# Altium PCB PCB.PcbDoc (part 1 of 2)
Units mil, origin at the board's own origin, x right, y up, seen from the top; angles counter-clockwise.
Board outline 2019.68 x 789.37 mil, 4 copper layers (Top Layer, GND Layer, Power Layer, Bottom Layer), stack 60.473 mil thick; 79 components, 57 nets, 311 pads, 115 vias.
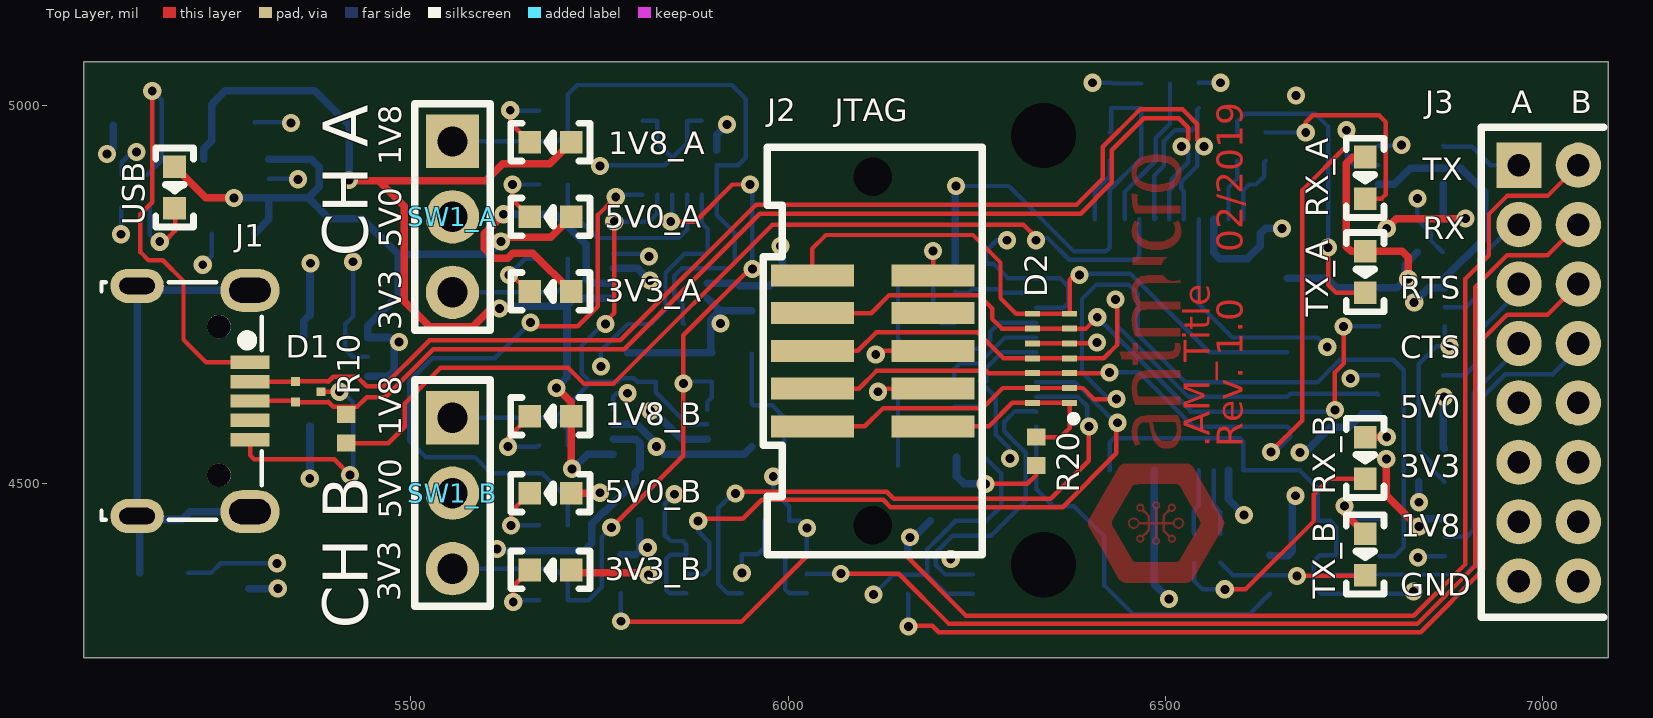
[diagram p0: Top Layer view]
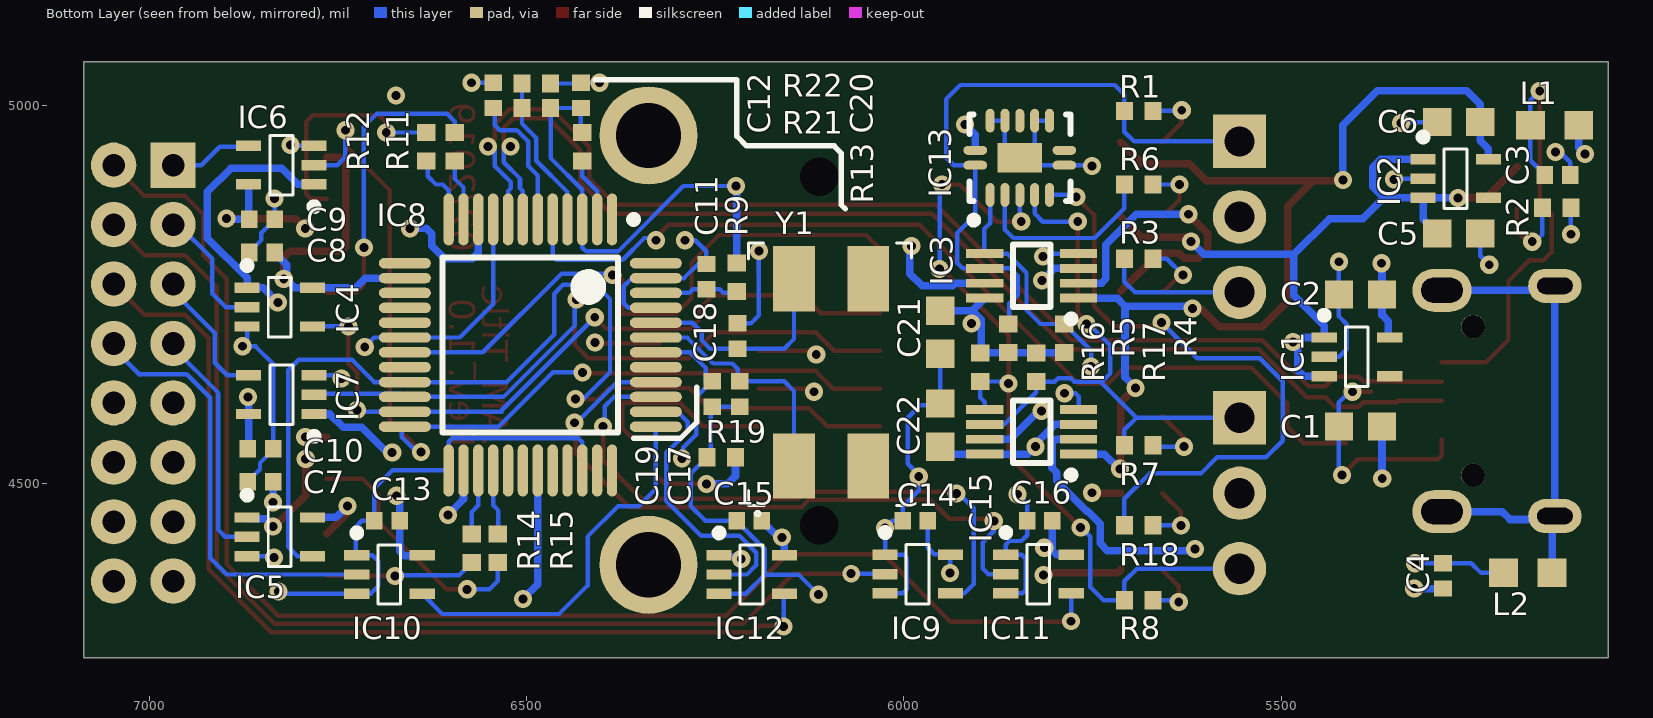
[diagram p1: Bottom Layer view, seen from below]
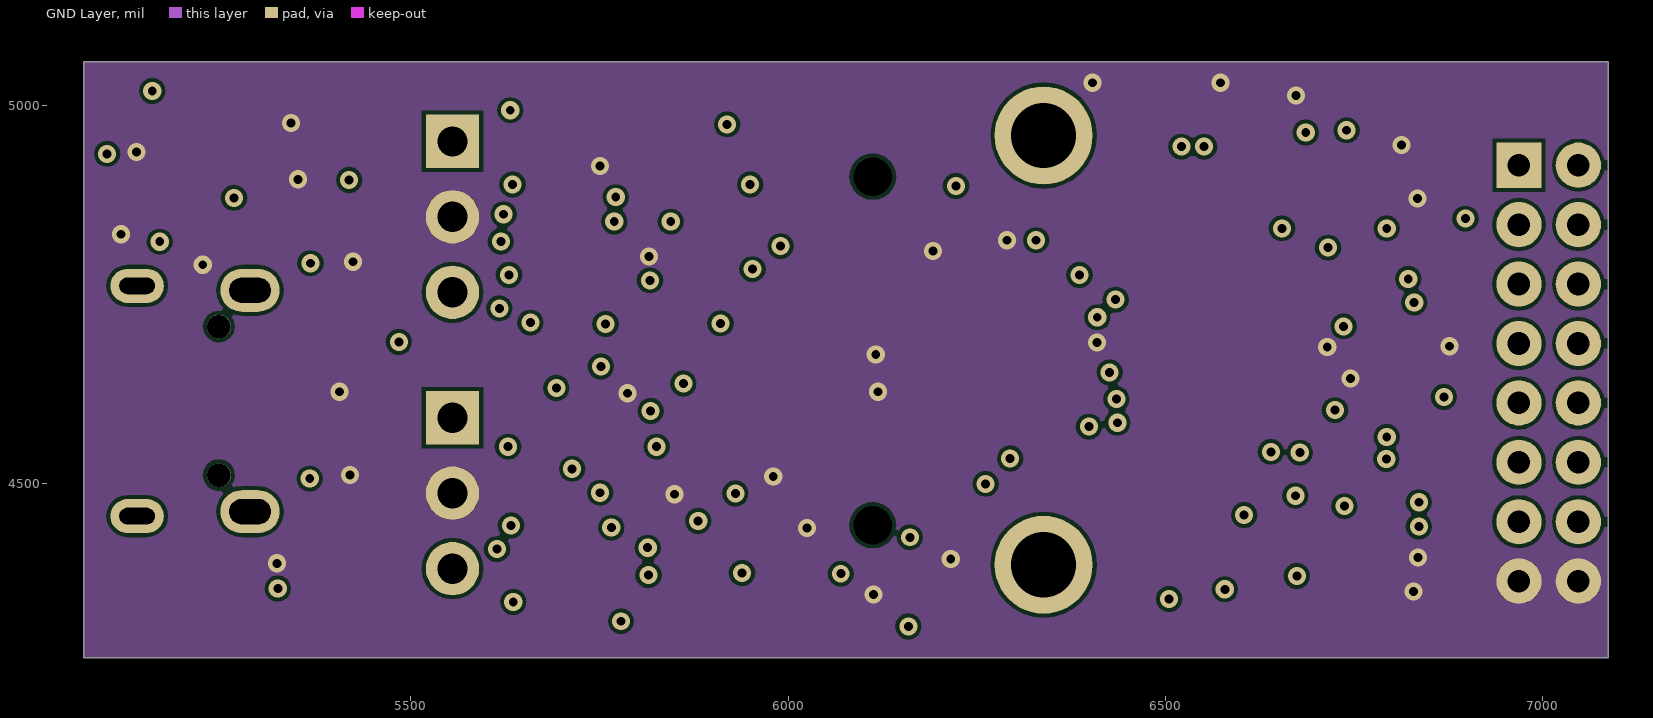
[diagram p2: GND Layer]
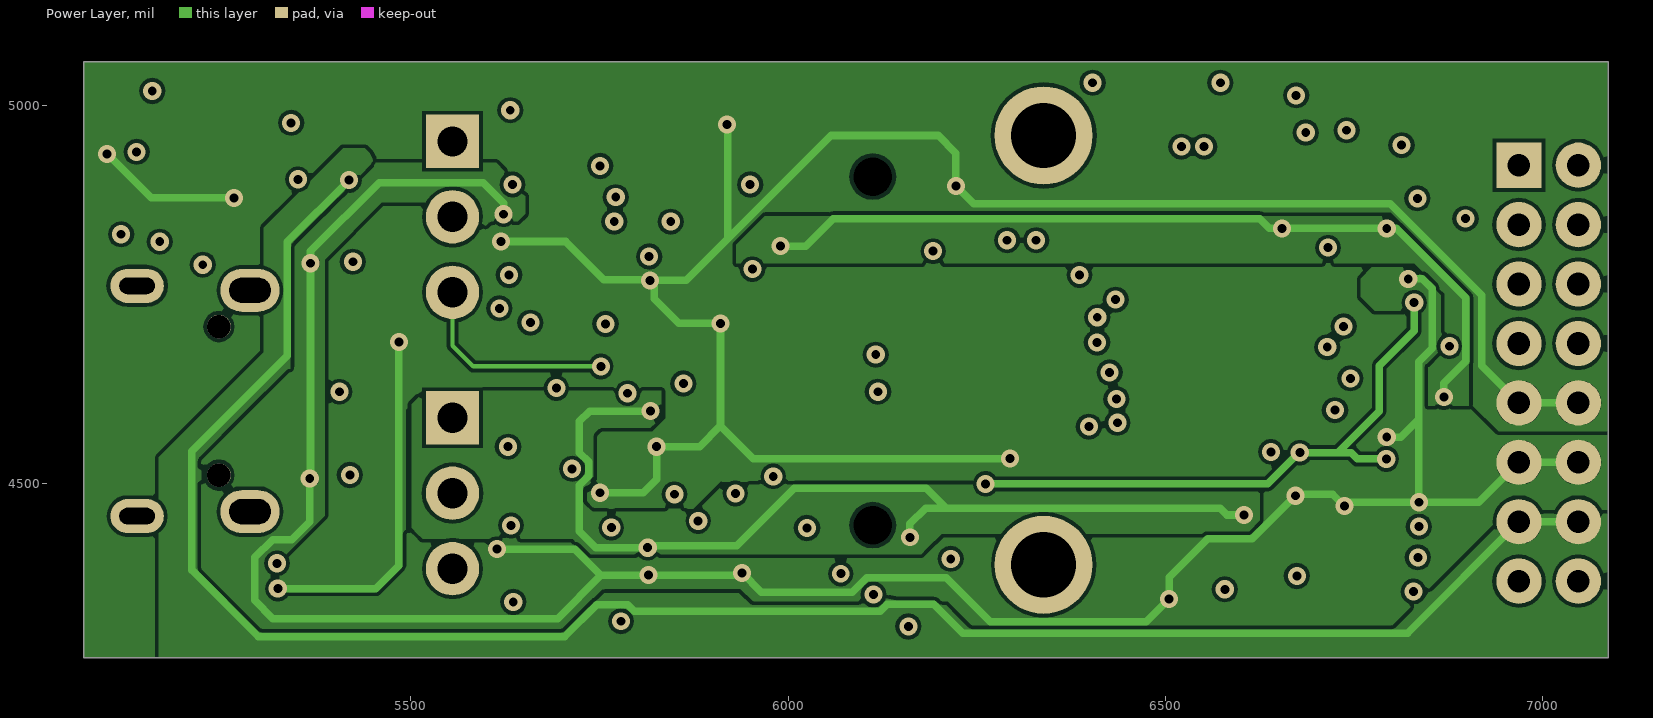
[diagram p3: Power Layer]
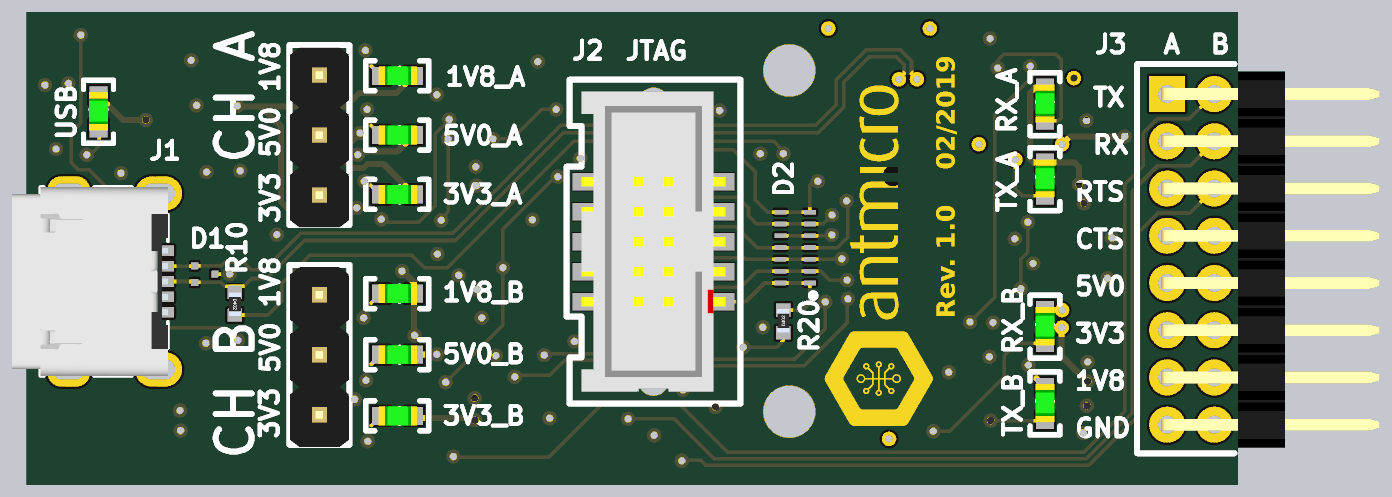
[diagram p5: 3D render of the assembled board from above, using the file's embedded part models]
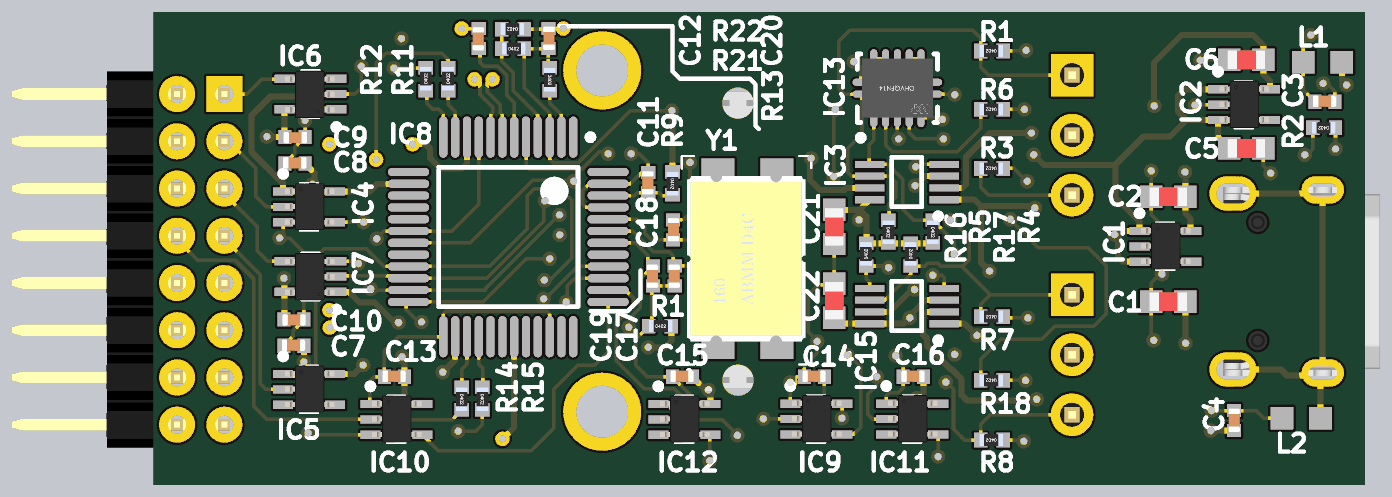
[diagram p6: 3D render of the assembled board from below, using the file's embedded part models]

## Layer stack, top to bottom
Top Solder: solder mask 0.3937, Solder Resist, Dk 3.5
Top Layer: signal copper 1.378
Dielectric 1: prepreg 14.1732, 7628MR, Dk 4.6
GND Layer: signal copper 0.7087
Dielectric 3: prepreg 14.1732, 7628MR, Dk 4.6
Power Layer: signal copper 0.7087
Dielectric 2: core 27.9528, FR+4, Dk 4.3
Bottom Layer: signal copper 1.378
Bottom Solder: solder mask 0.3937, Solder Resist, Dk 3.5

## Board outline
5066.93,4268.7 7086.61,4268.7 7086.61,5058.07 5066.93,5058.07

## Design rules (kind name [scope] priority, off if disabled: settings)
Clearance [All] p1: gap=5
DiffPairsRouting [All] p1: maxlimit=6 minlimit=6 mostfreqgap=6 toplayer_minwidth=6 toplayer_maxwidth=6 toplayer_prefwidth=6 midlayer1_minwidth=6 midlayer1_maxwidth=6 midlayer1_prefwidth=6 midlayer2_minwidth=6 midlayer2_maxwidth=6 midlayer2_prefwidth=6 bottomlayer_minwidth=6 bottomlayer_maxwidth=6 bottomlayer_prefwidth=6 maxuncoupledlength=500
HoleSize [All] p1: absolutevalues=TRUE maxlimit=150 minlimit=9.84 maxpercent=80.000 minpercent=20.000
MinimumAnnularRing [All] p1: minimumring=5.91
MinimumSolderMaskSliver [All] p1: minsoldermaskwidth=0
PlaneClearance [All] p1: clearance=10
PlaneConnect [All] p1: planeconnectstyle=Direct reliefexpansion=20 reliefentries=4 reliefconductorwidth=10 reliefairgap=10
PolygonConnect [All] p1: connectstyle=Relief reliefconductorwidth=19.68 reliefentries=4 polygonreliefangle="90 Angle" airgapwidth=0
RoutingVias [All] p1: holewidth=11.81 width=24.02 viastyle="Through Hole" minholewidth=11.81 minwidth=24.02 maxholewidth=11.81 maxwidth=24.02
SilkToSilkClearance [All] p1: silktosilkclearance=0
SilkToSolderMaskClearance [IsPad] p1: minsilkscreentomaskgap=0 clearancetoexposedcopper=TRUE
SolderMaskExpansion ViaTenting [isVia] p1: expansion=-11.81
SolderMaskExpansion [All] p2: expansion=4
Width [All] p1: maxlimit=78.74 minlimit=5.91 preferedwidth=8
22 further rules are at their usual default settings.

## Classes and differential pairs
differential pair USB_D: +USB_D_P -USB_D_N

## Components (designator, comment, footprint, x,y, rotation, side; value= is the part's Value field where it differs from the comment)
1V8_A "KPT-1608SGC" LED0603 5685.04,4951.77 r180 top
1V8_B "KPT-1608SGC" LED0603 5685.04,4588.58 r180 top
3V3_A "KPT-1608SGC" LED0603 5685.04,4753.94 r180 top
3V3_B "KPT-1608SGC" LED0603 5685.04,4384.84 r180 top
5V0_A "KPT-1608SGC" LED0603 5685.04,4852.85 r180 top
5V0_B "KPT-1608SGC" LED0603 5685.04,4486.71 r180 top
C1 "1u" 0603#1 5395,4575.16 r180 bottom
C2 "1u" 0603#1 5395,4750 r180 bottom
C3 "10n" 0402#1 5133.86,4908.46 r180 bottom
C4 "100n" 0402#1 5285.43,4376.97 r270 bottom
C5 "1u" 0603#1 5264.76,4830.71 r0 bottom
C6 "1u" 0603#1 5264.76,4978.35 r180 bottom
C7 "100n" 0402#1 6852.68,4501.69 r180 bottom
C8 "100n" 0402#1 6850.71,4805.63 r180 bottom
C9 "100n" 0402#1 6850.71,4849.53 r0 bottom
C10 "100n" 0402#1 6852.68,4545.59 r0 bottom
C11 "100n" 0402#1 6261.81,4773.62 r90 bottom
C12 "100n" 0402#1 6544.29,5013.78 r90 bottom
C13 "100n" 0402#1 6685,4450 r180 bottom
C14 "100n" 0402#1 5985,4450 r180 bottom
C15 "100n" 0402#1 6205,4450 r180 bottom
C16 "100n" 0402#1 5820,4450 r180 bottom
C17 "27p" 0402#1 6217.52,4618.11 r90 bottom
C18 "27p" 0402#1 6220.47,4694.88 r270 bottom
C19 "100n" 0402#1 6253.94,4618.11 r90 bottom
C20 "100n" 0402#1 6428.15,5013.78 r270 bottom
C21 "100n" 0603#1 5951.77,4699.8 r90 bottom
C22 "100n" 0603#1 5951.77,4576.77 r270 bottom
D1 "TPD2E009DRTR" SOT-3 5364.17,4621.06 r270 top
D2 "TPD6E05U06" TPD6E05U06_PASS 6348.43,4665.35 r90 top
IC1 "TLV70033DCKT" SC70-5 5442.91,4692.91 r180 bottom
IC2 "TLV70018DCKT" SC70-5 5312.01,4929.13 r180 bottom
IC3 "TS5A3359" TS5A3359 5830.71,4774.61 r0 bottom
IC4 "SN74LV1T125DCKR" SC70-5 6870.39,4758.71 r180 bottom
IC5 "SN74LV1T125DCKR" SC70-5 6870.39,4454.45 r180 bottom
IC6 "SN74LV1T125DCKR" SC70-5 6781.81,4895.79 r0 bottom
IC7 "SN74LV1T125DCKR" SC70-5 6781.81,4591.52 r0 bottom
IC8 "FT2232D" LQFP-48 6495.08,4683.07 r270 bottom
IC9 "SN74LV1T125DCKR" SC70-5 6025,4405 r180 bottom
IC10 "SN74LV1T125DCKR" SC70-5 6725,4404.45 r180 bottom
IC11 "SN74LV1T125DCKR" SC70-5 5865,4405 r180 bottom
IC12 "SN74LV1T125DCKR" SC70-5 6245,4404.45 r180 bottom
IC13 "74HC00BQ" DHVQFN14 5846.46,4931.1 r90 bottom
IC15 "TS5A3359" TS5A3359 5830.71,4567.91 r0 bottom
J1 "" WE_629105150521 5172.83,4608.82 r270 top
J2 "SHF-105-01-L-D-SM" SHF-105-01-X-D-SM 6112.2,4675.2 r90 top
J3 "MH_2X08_2.00_RA" MH_2X08_2.00_RA 6968.5,4921.26 r270 top
L1 "BLM18SG121TN1D" 0603#2 5137.8,4974.41 r0 bottom
L2 "BLM18SG121TN1D" 0603#2 5173.23,4380.91 r180 bottom
R1 "220R" 0402#2 5688.98,4993.11 r0 bottom
R2 "470R" 0402#2 5135,4865 r0 bottom
R3 "220R" 0402#2 5688.98,4797.24 r0 bottom
R4 "10k" 0402#2 5787.4,4691.93 r270 bottom
R5 "10k" 0402#2 5861.55,4691.93 r270 bottom
R6 "220R" 0402#2 5688.98,4895.67 r0 bottom
R7 "220R" 0402#2 5688.98,4550.2 r0 bottom
R8 "220R" 0402#2 5688.98,4344.49 r0 bottom
R9 "470R" 0402#2 6221.46,4772.64 r270 bottom
R10 "1k54" 0402#2 5414.37,4571.85 r270 top
R11 "220R" 0402#2 6595.47,4945.87 r90 bottom
R12 "220R" 0402#2 6632.87,4945.87 r90 bottom
R13 "10k" 0402#2 6426.18,4945.87 r270 bottom
R14 "220R" 0402#2 6572.76,4413.58 r270 bottom
R15 "220R" 0402#2 6538.31,4413.58 r270 bottom
R16 "10k" 0402#2 5898.62,4653.54 r90 bottom
R17 "10k" 0402#2 5824.48,4653.54 r90 bottom
R18 "220R" 0402#2 5688.98,4443.9 r0 bottom
R19 "10k" 0402#2 6242.13,4534.45 r180 bottom
R20 "0R" 0402#2 6328.74,4542.32 r90 top
R21 "4k7" 0402#2 6487.2,4997.05 r180 bottom
R22 "10k" 0402#2 6487.2,5029.53 r0 bottom
RX_A "KPT-1608SGC" LED0603 6764.76,4904.53 r270 top
RX_B "KPT-1608SGC" LED0603 6764.76,4533.46 r270 top
SW1_A "MH_1X03_2.54" MH_1X03_2.54 5555.33,4952.76 r270 top
SW1_B "MH_1X03_2.54" MH_1X03_2.54 5555.33,4586.61 r270 top
TX_A "KPT-1608SGC" LED0603 6764.76,4779.53 r270 top
TX_B "KPT-1608SGC" LED0603 6764.76,4405.51 r270 top
USB "KPT-1608SGC" LED0603 5187.01,4891.73 r270 top
Y1 "MQ-6.000-12-30/30/" Crystal_5x7mm 6145.67,4522.64 r90 bottom

## Footprints (in the part's own frame and the unit in brackets; to place one, negate y for a bottom-side part, rotate by r counter-clockwise, add the part's x,y. Pads: shape width x height; smd on the part's side, far side on the other; paste and mask are expansions set on the pad)
0402#1 [mm]
  rect 0.55x0.6 smd: 1(-0.425,0) 2(0.425,0)
  body extent -0.51,-0.23 0.5,0.27, height 0.49
0402#2 [mm]
  rect 0.57x0.62 smd: 1(-0.48,0) 2(0.48,0)
  body extent -0.47,-0.25 0.53,0.25, height 0.35
0603#1 [mm]
  rect 0.95x0.95 smd: 1(-0.725,0) 2(0.725,0)
  body extent -0.8,-0.4 0.8,0.4, height 0.45
0603#2 [mm] "Chip Inductor Ferrite Bead 0603"
  rect 0.97x0.96 smd: 1(-0.815,0) 2(0.815,0)
  body extent -0.87,-0.48 0.87,0.47, height 0.6
Crystal_5x7mm [mm]
  rect 2.2x1.4 smd: 1(0,0) 2(6.3,0) 3(6.3,-2.5) 4(0,-2.5)
  silkscreen extent -1.67,-3.95 7.5,1.53, body extent -0.35,-3.7 6.65,1.3, height 1.45
DHVQFN14 [mm] "QFN, 14-Leads, Body 2.50x3.00mm, Pitch 0.50mm, Thermal Pad 1.00x1.50mm, IPC Medium Density"
  oval 0.3x0.8 smd: 1(-0.25,1.5) 7(-0.25,-1.5) 8(0.25,-1.5) 14(0.25,1.5)
  oval 0.8x0.3 smd: 2(-1.25,1) 3(-1.25,0.5) 4(-1.25,0) 5(-1.25,-0.5) 6(-1.25,-1) 9(1.25,-1) 10(1.25,-0.5) 11(1.25,0) 12(1.25,0.5) 13(1.25,1)
  rect 1x1.5 smd: 15(0,0)
  silkscreen extent -2.22,-1.7 1.45,1.7, body extent -1.25,-1.5 1.25,1.5, height 0.85
LED0603 [mil]
  rect 30x30 smd: A(-27.5,0) K(27.5,0)
  silkscreen extent -52,-25 52,25, body extent -33,-16 31,16, height 43
LQFP-48 [mm] "LQFP-48, 48-Leads, Body 7.25x7.25mm, Pitch 0.50mm, IPC Medium Density"
  oval 1.75x0.35 smd: 1(-4.225,2.75) 2(-4.225,2.25) 3(-4.225,1.75) 4(-4.225,1.25) 5(-4.225,0.75) 6(-4.225,0.25) 7(-4.225,-0.25) 8(-4.225,-0.75) 9(-4.225,-1.25) 10(-4.225,-1.75) 11(-4.225,-2.25) 12(-4.225,-2.75) 25(4.225,-2.75) 26(4.225,-2.25) 27(4.225,-1.75) 28(4.225,-1.25) 29(4.225,-0.75) 30(4.225,-0.25) 31(4.225,0.25) 32(4.225,0.75) 33(4.225,1.25) 34(4.225,1.75) 35(4.225,2.25) 36(4.225,2.75)
  oval 0.35x1.75 smd: 13(-2.75,-4.225) 14(-2.25,-4.225) 15(-1.75,-4.225) 16(-1.25,-4.225) 17(-0.75,-4.225) 18(-0.25,-4.225) 19(0.25,-4.225) 20(0.75,-4.225) 21(1.25,-4.225) 22(1.75,-4.225) 23(2.25,-4.225) 24(2.75,-4.225) 37(2.75,4.225) 38(2.25,4.225) 39(1.75,4.225) 40(1.25,4.225) 41(0.75,4.225) 42(0.25,4.225) 43(-0.25,4.225) 44(-0.75,4.225) 45(-1.25,4.225) 46(-1.75,4.225) 47(-2.25,4.225) 48(-2.75,4.225)
  silkscreen extent -4.35,-2.95 2.95,3.6, body extent -3.65,-3.65 3.65,3.65, height 1.6
MH_1X03_2.54 [mm]
  rect 1.8x1.8 hole 1.02: 1(0,0)
  round 1.8 hole 1.02: 2(2.54,0) 3(5.08,0)
  silkscreen extent -1.27,-1.27 6.35,1.27, body extent -1.17,-1.25 6.45,1.25, height 8.33
MH_2X08_2.00_RA [mil]
  rect 60x60 hole 30: 1(0,0)
  round 60 hole 30: 2(0,78.74) 3(78.74,0) 4(78.74,78.74) 5(157.48,0) 6(157.48,78.74) 7(236.22,0) 8(236.22,78.74) 9(314.96,0) 10(314.96,78.74) 11(393.7,0) 12(393.7,78.74) 13(472.44,0) 14(472.44,78.74) 15(551.18,0) 16(551.18,78.74)
  silkscreen extent -50,-50 599,112, body extent -37,-10 590,354, height 164
SC70-5 [mm] "SC70, 5-Leads, Pitch 0,65mm, EIAJ SC-88a"
  rect 0.85x0.35 smd: 1(0,0) 2(0,-0.65) 3(0,-1.3) 4(2.2,-1.3) 5(2.2,0)
  silkscreen extent -0.13,-1.65 1.47,0.87, body extent 0.07,-1.63 2.17,0.37, height 0.96
SHF-105-01-X-D-SM [mil]
  round 0 hole 51.18: 0(-231,0) 0(230.98,0)
  rect 29x110 smd mask+2: 1(-100,-80) 2(-100,80) 3(-50,-80) 4(-50,80) 5(0,-80) 6(0,80) 7(50,-80) 8(50,80) 9(100,-80) 10(100,80)
  silkscreen extent -270,-145 270,145, body extent -250,-120 250,120, height 210
SOT-3 [mm]
  rect 0.3x0.3 smd: 1(-0.35,-0.425) 2(0.35,-0.425) 3(0,0.425)
  body extent -0.51,-0.38 0.51,0.38, height 0.51
TPD6E05U06_PASS [mm]
  rect 0.2x0.5 smd: 5(0.5,-0.625) 8(1.5,-0.625) 8(1.5,0.625) 9(1,-0.625) 9(1,0.625) 10(0.5,0.625) 11(0,0.625) 11(0,-0.625) 12(-0.5,-0.625) 12(-0.5,0.625) 13(-1,-0.625) 13(-1,0.625) 14(-1.5,-0.625) 14(-1.5,0.625)
  silkscreen extent -2.13,-0.86 -1.93,-0.66, body extent -1.88,-0.63 1.93,0.64, height 0.6
TS5A3359 [mm]
  rect 1.25x0.3 smd: 1(-1.579,0.75) 2(-1.579,0.25) 3(-1.579,-0.25) 4(-1.579,-0.75) 5(1.579,-0.75) 6(1.579,-0.25) 7(1.579,0.25) 8(1.579,0.75)
  silkscreen extent -1.45,-1.05 0.64,1.57, body extent -1.2,-1.05 1.2,1.05, height 0.9
WE_629105150521 [mm] "Micro USB 2.0 SMT Type B Horizontal 5 Contacts High Current"
  rect 0.45x1.3 smd: 1(-1.3,2.9) 2(-0.65,2.9) 3(0,2.9) 4(0.65,2.9) 5(1.3,2.9)
  oval 1.15x1.8 hole 0.55 slot 1.2 at 90 deg: S(-3.875,-0.9) S(3.875,-0.9)
  oval 1.45x2 hole 0.85 slot 1.4 at 90 deg: S(-3.725,2.9) S(3.725,2.9)
  round 0.8 hole 0.8 unplated: ""(-2.5,1.85) ""(2.5,1.85)
  silkscreen extent -4,-2.1 4,3.3, body extent -4,-3.3 4,3.3, height 2.71

## Part data
1V8_A 1V8_B 3V3_A 3V3_B 5V0_A 5V0_B RX_A RX_B TX_A TX_B USB: library part LED_G, "LED Green 0603 case"
C1 C2 C5 C6: library part C_1u_0603, "MLCC SMT Capacitor 1uF 0603"
C3: library part C_10n_0402, "MLCC SMT Capacitor 10nF 0402"
C4 C7 C8 C9 C10 C11 C12 C13 C14 C15 C16 C19 C20: library part C_100n_0402, "MLCC SMT Capacitor 100nF 0402"
C17 C18: library part C_27p_0402, "MLCC SMT Capacitor 27pF 0402"
C21 C22: library part C_100n_0603, "MLCC SMT Capacitor 100nF 0603"
D1: "ESD Suppressors 2-CH"
D2: library part TPD6E05U06_PASS, "ESD Suppressors 6-CH Pass through layout"
IC1: "Voltage Regulator, 2V to 5.5V, 175mV Dropout, 3.3Vout, 200mAout"
IC2: "Voltage Regulator, 2V to 5.5V, 175mV Dropout, 1.8Vout, 200mAout"
IC3 IC15: "Analogue Switch, SP3T, 1 Channels, 0.9 ohm, 1.65V to 5.5V, VSSOP, 8 Pins"
IC4 IC5 IC6 IC7 IC9 IC10 IC11 IC12: "Buffer, 74LV1T125, 1.6 V to 5.5 V, SOT-23-5"
IC8: "Dual USB-UART/FIFO"
IC13: "2 NAND Gate, 4 channel"
J1: library part WE_629105150521, "Micro USB B"
J2: "10 Positions Header Connector 0.050\" (1.27mm) Surface Mount Gold"
J3: "Male header, 2 x 08 pins, pitch 2.00 mm, right angle"
L1 L2: "FERRITE BEAD, 0.025OHM, 3A, 0603"
R1 R3 R6 R7 R8 R11 R12 R14 R15 R18: library part R_220R_0402, "SMT Resistor 220R 0402"
R2 R9: library part R_470R_0402, "SMT Resistor 470R 0402"
R4 R5 R13 R16 R17 R19 R22: library part R_10k_0402, "SMT Resistor 0402"
R10: library part R_1k54_0402, "SMT Resistor 1k54 0402"
R20: library part R_0R_0402, "SMT Resistor 0402"
R21: library part R_4k7_0402, "SMT Resistor 4k7 0402"
SW1_A SW1_B: "Male header, 1 x 03 pins, pitch 2.54 mm"
Y1: library part CRYSTAL_6_MHz_SMD, "CRYSTAL, 6MHZ, 12PF, SMD,30ppm"

## Free pads (board coordinates)
  round 0 / inner round 129.92 / far side round 129.92 hole 86.61: M(6338.58,4391.73) M(6338.58,4960.63)

## Via types
v1: diameter 24.02, hole 11.81, Top Layer to Bottom Layer, tented both sides, 101 vias
v2: diameter 24.02, hole 11.81, Top Layer to Bottom Layer, 11 vias
v3: diameter 23.62, hole 11.81, Top Layer to Bottom Layer, tented both sides, 3 vias

## Nets (pads, with @x,y where several pads share a name; then routed paths per layer and width w, separated by ;. In a path a pad name is that pad's centre, name@x,y a point inside that pad or via, vN(x,y) a via of type N, cw(c..) or ccw(c..) an arc to the next point about the centre after c; other vN are vias at no path point)
1V8: 1V8_A.A 1V8_B.A C6.2 IC2.5 IC3.1 IC15.1 J3.13 J3.14 | length 4027.5
  Top Layer w10: v1(5418.31,4901.57) 5419.29,4900.59 5457.68,4900.59 ; v1(5617.4,4731.53) 5606.53,4731.53 5582.33,4707.33 5524.95,4707.33 5491.14,4741.14 5491.14,4867.13 5457.68,4900.59 ; v1(5692.91,4625.98) 5693.9,4625.98 5712.54,4607.34 1V8_B.A@5712.54,4588.58 5712.54,4520.24 v1(5713.86,4518.92) ; 1V8_A.A@5712.54,4951.77 5684,4923.23 5622.05,4923.23 5599.41,4900.59 5457.68,4900.59
  Power Layer w10: v1(5418.31,4901.57) 5336.61,4819.88 5336.61,4817.91 5336.38,4817.68 5336.38,4669.06 5209.65,4542.32 5209.65,4384.84 5298.23,4296.26 5703.74,4296.26 5746.22,4338.74 5787.58,4338.74 5795.96,4330.35 6122.3,4330.35 6131.52,4339.57 6192.91,4339.57 6231.3,4301.18 6820.87,4301.18 J3.13@6968.5,4448.82 J3.14@7047.24,4448.82
  Bottom Layer w10: IC2.5@5225.39,4929.13 5225.39,4942.91 5236.22,4953.74 C6.2@5236.22,4978.35 5236.22,5001.97 5253.94,5019.69 5373.03,5019.69 5418.31,4974.41 v1(5418.31,4901.57) ; v1(5617.4,4731.53) 5620.48,4734.61 5707.05,4734.61 ; v1(5692.91,4625.98) 5707.05,4640.12 5707.05,4734.61 ; v1(5713.86,4518.92) 5714.79,4518.92 5734.25,4538.39 IC15.1@5768.54,4538.39 ; IC3.1@5768.54,4745.08 5717.52,4745.08 5707.05,4734.61
3V3_FT: 3V3_A.A 3V3_B.A C1.2 C2.2 C7.2 C8.2 C13.2 C14.2 IC1.5 IC3.2 IC4.5 IC5.5 IC8.14 IC8.31 IC9.5 IC10.5 IC15.2 J3.11 J3.12 RX_A.A RX_B.A TX_A.A TX_B.A | length 5325.9
  Top Layer w10: v1(5623.03,4856.3) 5623.03,4856.21 5597.36,4830.54 5597.36,4811 5610.25,4798.11 5628.48,4798.11 5635.1,4804.72 5661.75,4804.72 3V3_A.A@5712.54,4753.94 ; 3V3_B.A@5712.54,4384.84 5716.48,4380.91 5812.01,4380.91 v1(5814.96,4377.95) ; v1(6737.2,4469.49) 6737.2,4460.57 TX_B.A@6764.76,4433.01 ; RX_B.A@6764.76,4560.96 6793.25,4560.96 v2(6793.31,4561.02) ; RX_A.A@6764.76,4932.03 6747.97,4932.03 6739.76,4923.82 6739.76,4813.39 6746.12,4807.03 TX_A.A@6764.76,4807.03 6814.04,4807.03 6821.85,4799.21 v1(6821.85,4770.67)
  Power Layer w10: v1(5614.17,4412.4) 5717.52,4412.4 5751.97,4377.95 ; v1(5623.03,4856.3) 5623.03,4871.06 5595.9,4898.2 5458.24,4898.2 5367.13,4807.09 v1(5367.13,4791.34) 5367.13,4506.89 v1(5366.14,4505.91) 5366.14,4448.82 5342.52,4425.2 5316.93,4425.2 5293.31,4401.57 5293.31,4344.49 5317.28,4320.51 5694.53,4320.51 5751.97,4377.95 ; v2(6793.31,4561.02) 6812.01,4561.02 6835.63,4584.65 ; v1(6821.85,4770.67) 6840.55,4770.67 6853.7,4757.52 6853.7,4678.88 6835.63,4660.81 6835.63,4584.65 ; v1(6835.96,4474.63) 6835.85,4474.63 v1@6835.63,4474.41 ; J3.12@7047.24,4527.56 J3.11@6968.5,4527.56 6915.35,4474.41 v1@6835.63,4474.41 ; 5751.97,4377.95 v1(5814.96,4377.95) 5936.02,4377.95 v1(5938.98,4380.91) 5964.57,4355.31 6085.02,4355.31 6104.07,4374.37 6209.66,4374.37 6267.85,4316.18 6474.65,4316.18 v2(6504.92,4346.46) 6504.92,4375 6556.1,4426.18 6615.16,4426.18 v1(6672.24,4483.27) 6674.21,4485.24 6721.46,4485.24 v1(6737.2,4469.49) 6742.13,4474.41 v1@6835.63,4474.41 ; v1@6835.63,4474.41 6835.63,4584.65
  Bottom Layer w5.91: v1(5938.98,4380.91) 5938.39,4381.5 IC9.5@5938.39,4405 5938.9,4405.51 5959.65,4405.51 5968.27,4414.13 C14.2@5968.27,4450
  Bottom Layer w10: IC1.5@5356.3,4692.91 5358.27,4694.88 5358.27,4714.57 5366.46,4722.76 C2.2@5366.46,4750 5366.46,4790.67 v1(5367.13,4791.34) ; v1(5366.14,4505.91) 5366.46,4506.22 C1.2@5366.46,4575.16 ; v1(5614.17,4412.4) 5616.14,4410.43 5730.31,4410.43 5740,4420.12 5740,4446.32 5756.63,4462.95 5757.86,4462.95 5797.24,4502.34 5797.24,4513.78 5803.78,4520.31 5803.78,4552.52 5798.23,4558.07 IC15.2@5768.54,4558.07 ; v1(5623.03,4856.3) 5691.93,4856.3 5732.28,4815.94 5732.28,4770.67 5738.19,4764.76 IC3.2@5768.54,4764.76 ; IC8.31@6485.24,4516.73 6485.24,4366.14 v2(6504.92,4346.46) ; IC10.5@6638.39,4404.45 6639.29,4403.54 6662.4,4403.54 6668.27,4409.41 C13.2@6668.27,4450 6668.27,4479.29 v1(6672.24,4483.27) ; IC8.14@6661.42,4771.65 6713.58,4771.65 6726.52,4758.71 IC4.5@6783.78,4758.71 6806.94,4758.71 6817.91,4769.69 6817.91,4789.57 C8.2@6833.98,4805.63 ; v1(6737.2,4469.49) 6752.24,4454.45 IC5.5@6783.78,4454.45 ; v1(6835.96,4474.63) 6835.85,4474.63 6835.95,4474.73 C7.2@6835.95,4501.69
5V_USB: 5V0_A.A 5V0_B.A C4.2 C5.2 C19.2 C20.2 C21.2 C22.2 IC1.1 IC1.3 IC2.1 IC2.3 IC3.3 IC3.8 IC8.3 IC8.42 IC13.14 IC15.3 IC15.8 J3.9 J3.10 L1.1 R4.2 R5.2 R9.1 R13.1 R16.2 R17.2 R21.2 USB.A | length 5933.6
  Top Layer w10: USB.A@5187.01,4919.23 5228.29,4877.95 v1(5265.75,4877.95) ; v1@5614.17,4825.79 5685.47,4825.79 5V0_A.A@5712.54,4852.85 ; 5V0_B.A@5712.54,4486.71 5750.49,4486.71 v1(5750.98,4487.2)
  Power Layer w10: v1(5097.69,4936.26) 5156,4877.95 v1(5265.75,4877.95) ; v1(5323.82,4360.24) 5453.74,4360.24 5484.25,4390.75 v1(5484.25,4687.01) ; v1(5619.37,4820.12) 5705.47,4820.12 5755.91,4769.69 5815.94,4769.69 v1(5816.93,4768.7) 5865.16,4768.7 5920.28,4823.82 ; v1(5750.98,4487.2) 5808.07,4487.2 5825.79,4504.92 v1(5825.79,4548.23) 5882.87,4548.23 5910.43,4575.79 ; v1@5822.83,4768.7 5822.83,4744.09 5855.31,4711.61 v1(5910.43,4711.61) 5910.43,4575.79 ; v1(5919.29,4975.39) 5920.28,4974.41 5920.28,4823.82 ; v1(6294.29,4532.48) 5953.74,4532.48 5910.43,4575.79 ; J3.10@7047.24,4606.3 J3.9@6968.5,4606.3 6919.29,4655.51 6919.29,4749.02 6798.23,4870.08 6246.06,4870.08 v1(6222.44,4893.7) 6222.44,4937.01 6198.82,4960.63 6057.09,4960.63 5920.28,4823.82
  Bottom Layer w5.91: v1(6222.44,4893.7) 6292.32,4893.7 6379.02,4807.01 6421.18,4807.01 6426.18,4812.01 IC8.3@6426.18,4849.41 6426.18,4888.78 6468.31,4930.91 R21.2@6468.31,4997.05 C20.2@6428.15,4997.05 6428.15,4966.73 R13.1@6426.18,4964.76 ; C19.2@6253.94,4634.84 6254.36,4634.84 6275.43,4613.77 6275.43,4564.14 6292.32,4547.25 6292.32,4531.5 6293.31,4531.5 v1(6294.29,4532.48) ; C19.2@6262.8,4634.84 6262.8,4652.56 6283.46,4673.23 IC8.42@6328.74,4673.23
  Bottom Layer w10: v1@5105.71,4944.29 L1.1@5105.71,4974.41 ; v1(5265.75,4877.95) IC2.3@5312.01,4877.95 ; C4.2@5285.43,4360.24 v1(5323.82,4360.24) ; C5.2@5293.31,4830.71 5312.01,4849.41 IC2.3@5312.01,4877.95 ; IC2.1@5312.01,4929.13 5368.11,4929.13 5378.94,4918.31 5378.94,4892.72 5364.17,4877.95 ; IC1.3@5442.91,4641.73 5470.47,4641.73 5478.35,4649.61 v1@5478.35,4686.02 ; v1(5484.25,4687.01) 5483.27,4686.02 v1@5478.35,4686.02 ; v1(5619.37,4820.12) 5602.4,4803.15 5483.27,4803.15 ; IC15.3@5768.54,4577.76 5799.76,4577.76 v1@5825.79,4551.73 ; IC3.3@5768.54,4784.45 5800.57,4784.45 5806.83,4778.19 5807.44,4778.19 v1(5816.93,4768.7) ; R4.2@5787.4,4673.03 5787.99,4672.44 R17.2@5824.48,4672.44 R16.2@5898.62,4672.44 5897.64,4673.42 5897.64,4716.38 5909.61,4728.35 ; 5835.63,4538.39 IC15.8@5892.87,4538.39 5941.93,4538.39 C22.2@5951.77,4548.23 ; IC3.8@5892.87,4745.08 5909.61,4728.35 ; IC13.14@5905.51,4940.94 5905.51,4961.61 v1(5919.29,4975.39) ; C21.2@5951.77,4728.35 5909.61,4728.35 ; R9.1@6221.46,4791.54 6221.46,4892.72 v1(6222.44,4893.7) ; IC2.3@5312.01,4877.95 5364.17,4877.95 ; 5364.17,4877.95 5391.73,4850.39 5436.02,4850.39 5483.27,4803.15 ; v1@5478.35,4686.02 5471.46,4692.91 IC1.1@5442.91,4692.91 5442.91,4708.66 5483.27,4749.02 5483.27,4803.15
CN_JTAG_RESETN: D2.8 IC8.19 J2.10 | length 823.5
  Top Layer w5.91: J2.10@6032.2,4775.2 6032.2,4810.75 6050.2,4828.74 6245.08,4828.74 6281.5,4792.32 6281.5,4745.08 6302.17,4724.41 D2.8@6323.82,4724.41 D2.8@6373.03,4724.41 6373.03,4769.68 6379.92,4776.57 6385.83,4776.57 6386.14,4776.26 v1(6386.14,4775.82)
  Bottom Layer w5.91: v1@6397.64,4777.56 6453.74,4777.56 6558.07,4673.23 IC8.19@6661.42,4673.23
FTDI_RST: IC8.4 R21.1 R22.2 | length 205.1
  Bottom Layer w5.91: IC8.4@6445.87,4849.41 6445.87,4885.83 6487.13,4927.09 6487.13,4957.27 6506.1,4976.25 R21.1@6506.1,4997.05 R22.2@6506.1,5029.53
GND: C1.1 C2.1 C3.2 C4.1 C5.1 C6.1 C7.1 C8.1 C9.1 C10.1 C11.2 C12.2 C13.1 C14.1 C15.1 C16.1 C17.1 C18.1 C19.1 C20.1 C21.1 C22.1 D1.3 D2.5 D2.10 IC1.2 IC2.2 IC3.4 IC4.3 IC5.3 IC6.3 IC7.3 IC8.9 IC8.18 IC8.25 IC8.34 IC8.45 IC8.47 IC9.1 IC9.3 IC10.1 IC10.3 IC11.1 IC11.3 IC12.1 IC12.3 IC13.7 IC13.9 IC13.10 IC13.12 IC13.13 IC13.15 IC15.4 J1.5 J2.3 J2.5 J2.9 J3.15 J3.16 L2.1 R2.1 R19.1 R22.1 SW1_A.2 SW1_B.2 | length 4463.2
  Top Layer w5.91: J1.5@5287.01,4557.64 5287.01,4536.81 5292.32,4531.5 5398.62,4531.5 v1(5419.29,4510.83) ; D1.3@5380.91,4621.06 v1(5405.51,4621.06) ; v1(6116.14,4670.28) 6121.06,4675.2 J2.5@6192.2,4675.2 ; v1(6119.09,4621.06) 6123.23,4625.2 J2.3@6192.2,4625.2 ; J2.9@6192.2,4775.2 v1(6192.23,4807.32) ; D2.10@6323.82,4685.04 D2.5@6373.03,4685.04 6408.11,4685.04 v1(6409.45,4686.38)
  Bottom Layer w5.91: v1(5116.14,4829.72) 5116.1,4829.76 R2.1@5116.1,4865 R2.1@5117.13,4866.02 ; C3.2@5117.13,4908.46 5117.13,4925.2 5130.91,4938.98 v1(5136.81,4938.98) ; L2.1@5205.31,4380.91 5235.24,4380.91 5248.03,4393.7 C4.1@5285.43,4393.7 v1(5322.83,4393.7) ; v1(5224.41,4789.37) 5236.22,4801.18 C5.1@5236.22,4830.71 ; C6.1@5293.31,4978.35 5340.55,4978.35 v1(5341.54,4977.36) ; IC2.2@5312.01,4903.54 5349.41,4903.54 v1(5350.39,4902.56) ; v1(5405.51,4621.06) 5409.45,4621.06 5423.54,4606.97 C1.1@5423.54,4575.16 5423.54,4515.08 v1(5419.29,4510.83) ; v1(5423.23,4793.31) 5423.54,4792.99 C2.1@5423.54,4750 5423.54,4720.79 5413.39,4710.63 5413.39,4677.17 5423.23,4667.32 IC1.2@5442.91,4667.32 ; v1(5750.98,4920.28) 5751.97,4921.26 IC13.7@5787.4,4921.26 5836.61,4921.26 IC13.15@5846.46,4931.1 ; IC15.4@5768.54,4597.44 5768.54,4615 5772.64,4619.09 v1(5787.4,4619.09) ; IC3.4@5768.54,4804.13 5812.01,4804.13 v1(5815.94,4800.2) ; IC13.9@5807.09,4980.31 IC13.10@5826.77,4980.31 5826.77,4950.79 IC13.15@5846.46,4931.1 ; 5842.99,4353.82 IC11.3@5865,4353.82 ; 5843.01,4353.84 5838.58,4358.27 5838.58,4399.61 5843.98,4405 IC11.1@5865,4405 5865,4418.46 5860.24,4423.23 5844.49,4423.23 5836.73,4430.98 C16.1@5836.73,4450 5836.73,4472.56 v1(5849.41,4485.24) ; IC13.13@5885.83,4980.31 IC13.12@5866.14,4980.31 5866.14,4950.79 IC13.15@5846.46,4931.1 ; C21.1@5951.77,4671.26 C22.1@5951.77,4605.31 5953.74,4603.35 5978.35,4603.35 5995.08,4586.61 5995.08,4525.59 5980.31,4510.83 v1(5980.31,4508.86) 5980.31,4490.16 6001.73,4468.74 C14.1@6001.73,4450 6015.55,4450 v1(6025,4440.55) IC9.1@6025,4405 6000.47,4405 5996.06,4400.59 5996.06,4359.25 6001.5,4353.82 IC9.3@6025,4353.82 ; v1(6113.19,4352.36) 6139.13,4378.31 6184.69,4378.31 ; v1@6195.62,4810.71 v1(6192.23,4807.32) 6192.23,4722.14 6202.76,4711.61 C18.1@6220.47,4711.61 ; v1(6215.55,4399.61) 6220.39,4404.45 IC12.1@6245,4404.45 ; C17.1@6220.47,4601.38 6255.91,4601.38 6255.91,4539.57 R19.1@6261.02,4534.45 6261.02,4534.25 6282.48,4512.8 6282.48,4469.49 6262.99,4450 C15.1@6221.73,4450 6221.73,4449.58 6208.25,4436.1 6208.08,4436.1 6207.05,4435.07 6207.05,4434.89 6202.39,4430.24 6202.22,4430.24 6184.69,4412.71 6184.69,4378.31 ; IC12.3@6245,4353.27 6209.72,4353.27 6184.69,4378.31 ; v1(6290.35,4821.85) 6276.57,4821.85 6261.81,4807.09 C11.2@6261.81,4790.35 6272.64,4790.35 6291.34,4771.65 IC8.47@6328.74,4771.65 6360.24,4771.65 6371.14,4760.75 6371.14,4738.27 6365.16,4732.28 IC8.45@6328.74,4732.28 ; v2(6403.54,5030.51) C20.1@6428.15,5030.51 6429.13,5029.53 R22.1@6468.31,5029.53 ; IC8.34@6426.18,4516.73 6426.18,4554.13 6431.18,4559.13 6599.33,4559.13 6603.35,4555.12 IC8.25@6603.35,4516.73 6678.15,4516.73 6701.73,4493.15 C13.1@6701.73,4450 6718.31,4450 6726.38,4441.93 6726.38,4405.83 IC10.1@6725,4404.45 6704.65,4404.45 6696.85,4396.65 6696.85,4363.19 6706.77,4353.27 IC10.3@6725,4353.27 6825.71,4353.27 v1(6828.74,4356.3) ; IC8.9@6544.29,4849.41 6544.29,4765.75 6544.29,4737.2 6588.58,4692.91 IC8.18@6661.42,4692.91 6701.77,4692.91 v1(6714.57,4680.12) ; C12.2@6544.29,5030.51 v2(6572.83,5030.51) ; v1(6745.08,4638.78) 6749,4642.7 IC7.3@6781.81,4642.7 ; IC6.3@6781.81,4946.97 6812.13,4946.97 v2(6812.99,4947.83) ; v1(6833.98,4877.28) 6836.61,4879.92 6829.72,4879.92 6833.98,4875.67 C9.1@6833.98,4849.53 6833.98,4849.09 6851.38,4831.69 6851.38,4822.11 6867.44,4806.05 C8.1@6867.44,4805.63 ; v1(6834.65,4401.57) 6836.34,4403.27 IC5.3@6870.39,4403.27 ; C7.1@6869.41,4501.69 6869.41,4502.11 6853.35,4518.18 6853.35,4526.57 6835.95,4543.98 C10.1@6835.95,4545.59 6835.95,4657.8 6859.25,4681.1 v1@6872.05,4681.1 ; IC4.3@6870.39,4707.53 6870.39,4682.76 v1@6872.05,4681.1 ; v1(6876.32,4681.33) 6872.28,4681.33 v1@6872.05,4681.1
  other v1: 6673.23,5013.78
IN1_A: IC3.6 IC13.1 R1.2 R5.1 SW1_A.1 | length 871.5
  Bottom Layer w5.91: SW1_A.1@5555.33,4952.76 5694.88,4952.76 5707.87,4965.75 R1.2@5707.87,4993.11 5707.87,5014.96 5720.47,5027.56 5925.2,5027.56 5943.9,5008.86 5943.9,4931.1 5934.06,4921.26 IC13.1@5905.51,4921.26 5905.51,4855.31 5929.13,4831.69 5929.13,4791.34 5922.24,4784.45 IC3.6@5892.87,4784.45 5859.25,4784.45 5849.41,4774.61 5849.41,4749.02 5860.31,4738.11 5860.31,4712.06 R5.1@5861.55,4710.83
IN1_B: IC13.5 IC15.6 R7.2 R17.1 SW1_B.1 | length 762.5
  Top Layer w5.91: v1(5758.15,4710.86) 5758.15,4713.81 5769.69,4725.34 v1(5769.69,4846.46)
  Bottom Layer w5.91: SW1_B.1@5555.33,4586.61 5691.93,4586.61 ; R7.2@5707.87,4550.2 5707.87,4570.67 5691.93,4586.61 ; 5739.96,4634.65 5740.04,4634.57 5774.65,4634.57 5779.13,4639.06 5795.67,4639.06 5800.16,4634.57 5824.4,4634.57 R17.1@5824.48,4634.65 5824.48,4620.41 5867.13,4577.76 IC15.6@5892.87,4577.76 ; v1(5758.15,4710.86) 5758.15,4713.81 5726.38,4682.04 5726.38,4645.67 5738.68,4633.37 5691.93,4586.61 ; v1(5769.69,4846.46) 5815.94,4846.46 5826.77,4857.28 IC13.5@5826.77,4881.89
IN2_A: IC3.5 IC13.2 R3.2 R4.1 SW1_A.3 | length 792.9
  Power Layer w5.91: SW1_A.3@5555.33,4752.76 5555.33,4681.87 5582.68,4654.53 v1(5751.97,4654.53)
  Bottom Layer w5.91: SW1_A.3@5555.33,4752.76 5693.71,4752.76 5707.87,4766.93 R3.2@5707.87,4797.24 ; v1(5751.97,4654.53) 5751.97,4675.39 R4.1@5787.4,4710.83 5819.09,4710.83 5837.6,4729.33 5837.6,4778.54 5863.19,4804.13 IC3.5@5892.87,4804.13 5893.7,4804.96 5893.7,4836.61 5885.83,4844.49 IC13.2@5885.83,4881.89
IN2_B: IC13.4 IC15.5 R8.2 R16.1 SW1_B.3 | length 1113.8
  Top Layer w5.91: v1(5765.75,4440.94) 5861.22,4536.42 v1(5861.22,4631.89) 5861.22,4695.87 5951.77,4786.42 5952.76,4785.43 v1(5952.76,4783.46) ; v1@5835.63,4846.46 5876.97,4846.46 5926.18,4895.67 v1(5949.8,4895.67)
  Bottom Layer w5.91: SW1_B.3@5555.33,4386.61 5691.14,4386.61 5707.87,4369.88 R8.2@5707.87,4344.49 5735.24,4344.49 5752.95,4362.2 5752.95,4429.13 5764.76,4440.94 v1(5765.75,4440.94) ; v1@5835.63,4846.46 5846.46,4857.28 IC13.4@5846.46,4881.89 ; v1(5861.22,4631.89) 5863.98,4634.65 R16.1@5898.62,4634.65 5898.62,4613.19 5892.87,4607.44 IC15.5@5892.87,4597.44 ; v1(5949.8,4895.67) 5952.76,4892.72 v1(5952.76,4783.46)
  other v1: 5844.49,4846.46
IN12_A: IC13.3 R6.2 | length 258.3
  Bottom Layer w5.91: R6.2@5708.86,4894.69 R6.2@5707.87,4895.67 5707.87,4863.98 5747.05,4824.8 5855.31,4824.8 5866.14,4835.63 IC13.3@5866.14,4881.89
IN12_B: IC13.6 R18.2 | length 842.1
  Top Layer w5.91: v1(5658.46,4712.6) 5663.39,4707.68 5721.46,4707.68 5748.03,4734.25 5748.03,4855.31 v1(5771.65,4878.94)
  Bottom Layer w5.91: v1(5658.46,4712.6) 5611.22,4665.35 5528.54,4665.35 5498.03,4634.84 5498.03,4556.1 5519.69,4534.45 5584.65,4534.45 5606.3,4512.8 5674.21,4512.8 5707.87,4479.13 R18.2@5707.87,4443.9 ; v1(5771.65,4878.94) 5774.61,4881.89 IC13.6@5807.09,4881.89
JTAG_VCC: D2.14 J2.1 R20.2 | length 276.4
  Top Layer w5.91: J2.1@6192.2,4575.2 6266.14,4575.2 6297.24,4606.3 D2.14@6323.82,4606.3 D2.14@6373.03,4606.3 6373.03,4572.83 6361.22,4561.02 6328.94,4561.02 R20.2@6328.74,4561.22
Net1V8_A_K: 1V8_A.K R1.1 | length 91.5
  Top Layer w5.91: v1(5631.89,4994.09) 5631.89,4977.42 1V8_A.K@5657.54,4951.77
  Bottom Layer w5.91: v1(5631.89,4994.09) 5632.87,4993.11 R1.1@5670.08,4993.11
Net1V8_B_K: 1V8_B.K R7.1 | length 95
  Top Layer w5.91: v1(5628.94,4548.23) 5627.95,4549.21 5627.95,4559 1V8_B.K@5657.54,4588.58
  Bottom Layer w5.91: v1(5628.94,4548.23) 5668.11,4548.23 R7.1@5670.08,4550.2
Net3V3_A_K: 3V3_A.K R3.1 | length 85.2
  Top Layer w5.91: v1(5630.2,4775.82) 5633.63,4775.82 5655.51,4753.94 3V3_A.K@5657.54,4753.94
  Bottom Layer w5.91: v1(5630.2,4775.82) 5651.62,4797.24 R3.1@5670.08,4797.24
Net3V3_B_K: 3V3_B.K R8.1 | length 86.4
  Top Layer w5.91: v1(5635.83,4342.52) 5635.83,4363.13 3V3_B.K@5657.54,4384.84
  Bottom Layer w5.91: v1(5635.83,4342.52) 5637.8,4344.49 R8.1@5670.08,4344.49
Net5V0_A_K: 5V0_A.K R6.1 | length 87.5
  Top Layer w5.91: v1(5634.84,4895.67) 5634.84,4875.55 5V0_A.K@5657.54,4852.85
  Bottom Layer w5.91: v1(5634.84,4895.67) R6.1@5670.08,4895.67
Net5V0_B_K: 5V0_B.K R18.1 | length 90.2
  Top Layer w5.91: v1(5632.87,4443.9) 5632.87,4462.05 5V0_B.K@5657.54,4486.71
  Bottom Layer w5.91: v1(5632.87,4443.9) R18.1@5670.08,4443.9
NetC3_1: C3.1 J1.1 L1.2 | length 595.8
  Top Layer w5.91: v1(5157.48,5019.69) 5157.48,4872.05 5141.73,4856.3 5141.73,4806.1 5152.56,4795.28 5171.26,4795.28 5198.82,4767.72 5198.82,4689.96 5228.78,4660 J1.1@5287.01,4660
  Bottom Layer w5.91: C3.1@5150.59,4908.46 5169.88,4927.76 L1.2@5169.88,4974.41 5169.88,5007.28 v1(5157.48,5019.69)
NetC11_1: C11.1 IC8.46 R9.2 | length 112.1
  Bottom Layer w5.91: R9.2@6221.46,4753.74 6223.23,4751.97 6239.17,4751.97 6244.09,4756.89 C11.1@6261.81,4756.89 6279.53,4756.89 6284.45,4751.97 IC8.46@6328.74,4751.97
NetC12_1: C12.1 IC8.6 | length 188.3
  Bottom Layer w5.91: IC8.6@6487.28,4851.46 IC8.6@6485.24,4849.41 6485.24,4907.48 6498.03,4920.28 6498.03,4952.76 6512.8,4967.52 6535.43,4967.52 6542.32,4974.41 6542.32,4995.08 C12.1@6544.29,4997.05
NetC17_2: C17.2 IC8.43 Y1.1 | length 321.6
  Bottom Layer w5.91: Y1.1@6145.67,4522.64 6145.67,4622.05 6158.46,4634.84 6220.47,4634.84 6220.47,4651.57 6227.36,4658.46 6252.95,4658.46 6287.4,4692.91 IC8.43@6328.74,4692.91
NetC18_2: C18.2 IC8.44 Y1.2 | length 288.7
  Bottom Layer w5.91: Y1.2@6145.67,4770.67 6145.67,4690.95 6158.46,4678.15 C18.2@6220.47,4678.15 6256.89,4678.15 6267.72,4688.98 6267.72,4699.8 6280.51,4712.6 IC8.44@6328.74,4712.6
NetIC8_2: IC8.2 R13.2 | length 85.7
  Bottom Layer w5.91: IC8.2@6406.5,4849.41 6406.5,4886.81 6426.18,4906.5 R13.2@6426.18,4926.97
NetIC8_5: IC8.5 R10.2 | length 1275.8
  Top Layer w5.91: R10.2@5414.37,4552.95 5470.28,4552.95 5492.13,4574.8 5492.13,4605.52 5539.16,4652.56 5708.66,4652.56 5729.33,4631.89 5768.7,4631.89 5979.33,4842.52 6312.01,4842.52 v1@6328.74,4825.79
  Bottom Layer w5.91: v1@6328.74,4825.79 6329.72,4824.8 6343.83,4824.8 6372.53,4796.1 6460.47,4796.1 6465.55,4801.18 IC8.5@6465.55,4849.41
  other v1: 6328.74,4821.85
NetR2_2: R2.2 USB.K | length 109.8
  Top Layer w5.91: v1(5167.32,4819.88) 5173.23,4819.88 5187.99,4834.65 5187.99,4863.25 USB.K@5187.01,4864.23
  Bottom Layer w5.91: R2.2@5153.9,4865 5153.9,4829.37 5163.39,4819.88 v1(5167.32,4819.88)
NetR11_2: R11.2 TX_A.K | length 409
  Top Layer w5.91: v2(6715.55,4812.01) 6715.55,4762.8 6726.32,4752.03 TX_A.K@6764.76,4752.03
  Bottom Layer w5.91: R11.2@6595.47,4964.76 6595.47,4979.33 6605.31,4989.17 6698.82,4989.17 6715.55,4972.44 v2(6715.55,4812.01)
NetR12_2: R12.2 RX_A.K | length 306.3
  Top Layer w5.91: v1(6686.02,4964.57) 6686.02,4978.35 6695.16,4987.48 6783.19,4987.48 6792.32,4978.35 6792.32,4882.87 6786.48,4877.03 RX_A.K@6764.76,4877.03
  Bottom Layer w5.91: R12.2@6632.87,4964.76 6633.07,4964.57 v1(6686.02,4964.57)
NetR14_2: R14.2 TX_B.K | length 199.8
  Top Layer w5.91: v1(6674.21,4376.97) 6763.72,4376.97 TX_B.K@6764.76,4378.01
  Bottom Layer w5.91: R14.2@6572.76,4394.69 6589.49,4377.95 6673.23,4377.95 v1(6674.21,4376.97)
NetR15_2: R15.2 RX_B.K | length 337.1
  Top Layer w5.91: v1(6578.74,4359.25) 6606.3,4359.25 6696.85,4449.8 6696.85,4485.3 6717.52,4505.96 RX_B.K@6764.76,4505.96
  Bottom Layer w5.91: R15.2@6538.31,4394.69 6538.31,4370.16 6549.21,4359.25 v1(6578.74,4359.25)
SHIELD: J1.S L2.2 | length 684.6
  Bottom Layer w10: L2.2@5141.14,4380.91 J1.S@5141.14,4452.52 ; J1.S@5287.01,4462.17 5207.24,4462.17 5196.85,4451.77 5141.89,4451.77 J1.S@5141.14,4452.52 ; J1.S@5287.01,4755.47 5143.31,4755.47 J1.S@5137.4,4761.38 J1.S@5137.4,4456.26 J1.S@5141.14,4452.52
UART_1_CTS: D2.13 IC5.4 IC8.21 J2.2 | length 1403.3
  Top Layer w5.91: J2.2@6032.2,4575.2 6101.77,4575.2 6125.98,4599.41 6257.87,4599.41 6284.45,4625.98 D2.13@6323.82,4625.98 6390.75,4625.98 6405.51,4611.22 v1(6435.04,4611.22) v1@6430.12,4606.3
  Bottom Layer w5.91: v1(6435.04,4611.22) 6425.2,4611.22 6389.49,4646.93 6389.49,4743.82 6408.74,4763.07 6451.5,4763.07 6463.5,4751.06 6463.5,4696.82 6526.47,4633.86 IC8.21@6661.42,4633.86 6701.77,4633.86 6731.3,4663.39 6802.17,4663.39 6816,4649.55 6816,4415.41 6803.86,4403.27 IC5.4@6783.78,4403.27
UART_1_CTS_T: IC5.2 J3.7 | length 313.8
  Bottom Layer w5.91: IC5.2@6870.39,4428.86 6899.33,4428.86 6908.39,4437.91 6908.39,4619.34 6968.5,4679.46 J3.7@6968.5,4685.04
UART_1_OE: IC4.1 IC5.1 IC6.1 IC7.1 R19.2 R20.1 | length 1580.4
  Top Layer w5.91: v1(6261.81,4499.02) v1@6264.76,4501.97 ; v1@6264.76,4499.02 6316.93,4499.02 6328.74,4510.83 R20.1@6328.74,4523.43
  Top Layer w10: v2(6792.77,4532.01) 6792.77,4484.09 v1@6834.65,4442.22
  Power Layer w10: v1(6261.81,4499.02) 6635.66,4499.02 6676.99,4540.35 v1(6678.15,4540.35) 6728.35,4540.35 ; v2(6792.77,4532.01) 6754.41,4532.01 6746.06,4540.35 6728.35,4540.35 ; v1(6829.72,4739.17) 6829.72,4701.77 6783.46,4655.51 6783.46,4595.47 6728.35,4540.35
  Bottom Layer w10: R19.2@6223.23,4534.45 6223.23,4509.06 6233.27,4499.02 v1(6261.81,4499.02) ; v1(6678.15,4540.35) 6684.43,4540.35 6718.25,4574.17 6736.48,4574.17 6736.83,4573.82 6743.11,4573.82 6760.81,4591.52 IC7.1@6781.81,4591.52 ; IC6.1@6781.81,4895.79 6803.27,4895.79 6824.8,4917.32 6891.73,4917.32 6923.23,4885.83 6923.23,4824.64 6870.39,4771.8 IC4.1@6870.39,4758.71 6849.27,4758.71 v1(6829.72,4739.17) ; v1@6834.65,4442.22 6845.05,4452.62 6868.56,4452.62 IC5.1@6870.39,4454.45
  other v1: 6835.96,4442.22